# Allegro board BP1_03v2.brd
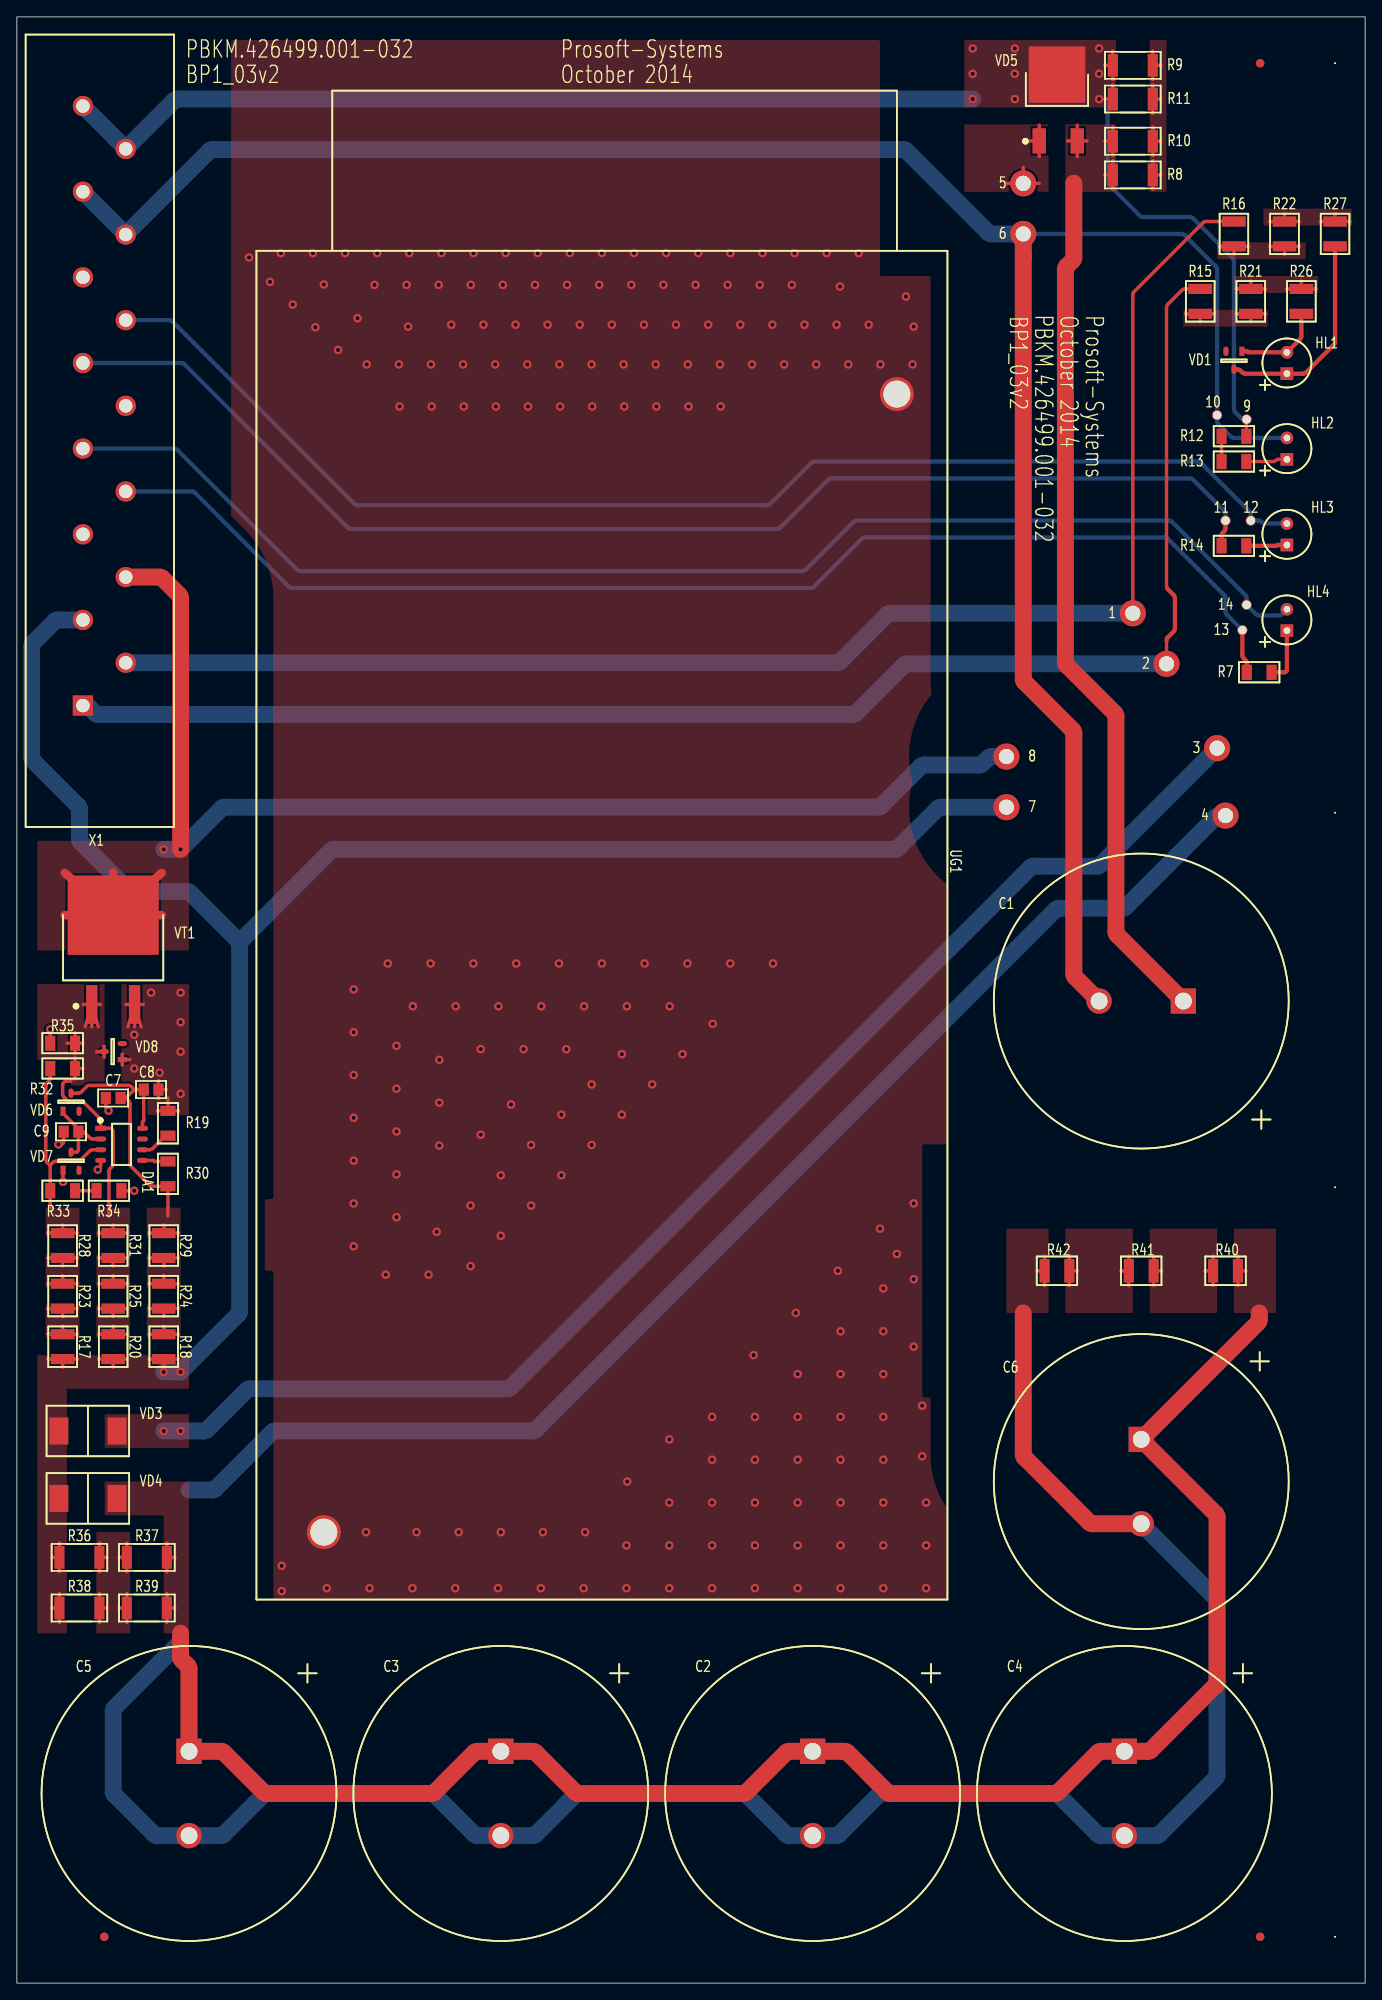
[diagram p0: board, top side]
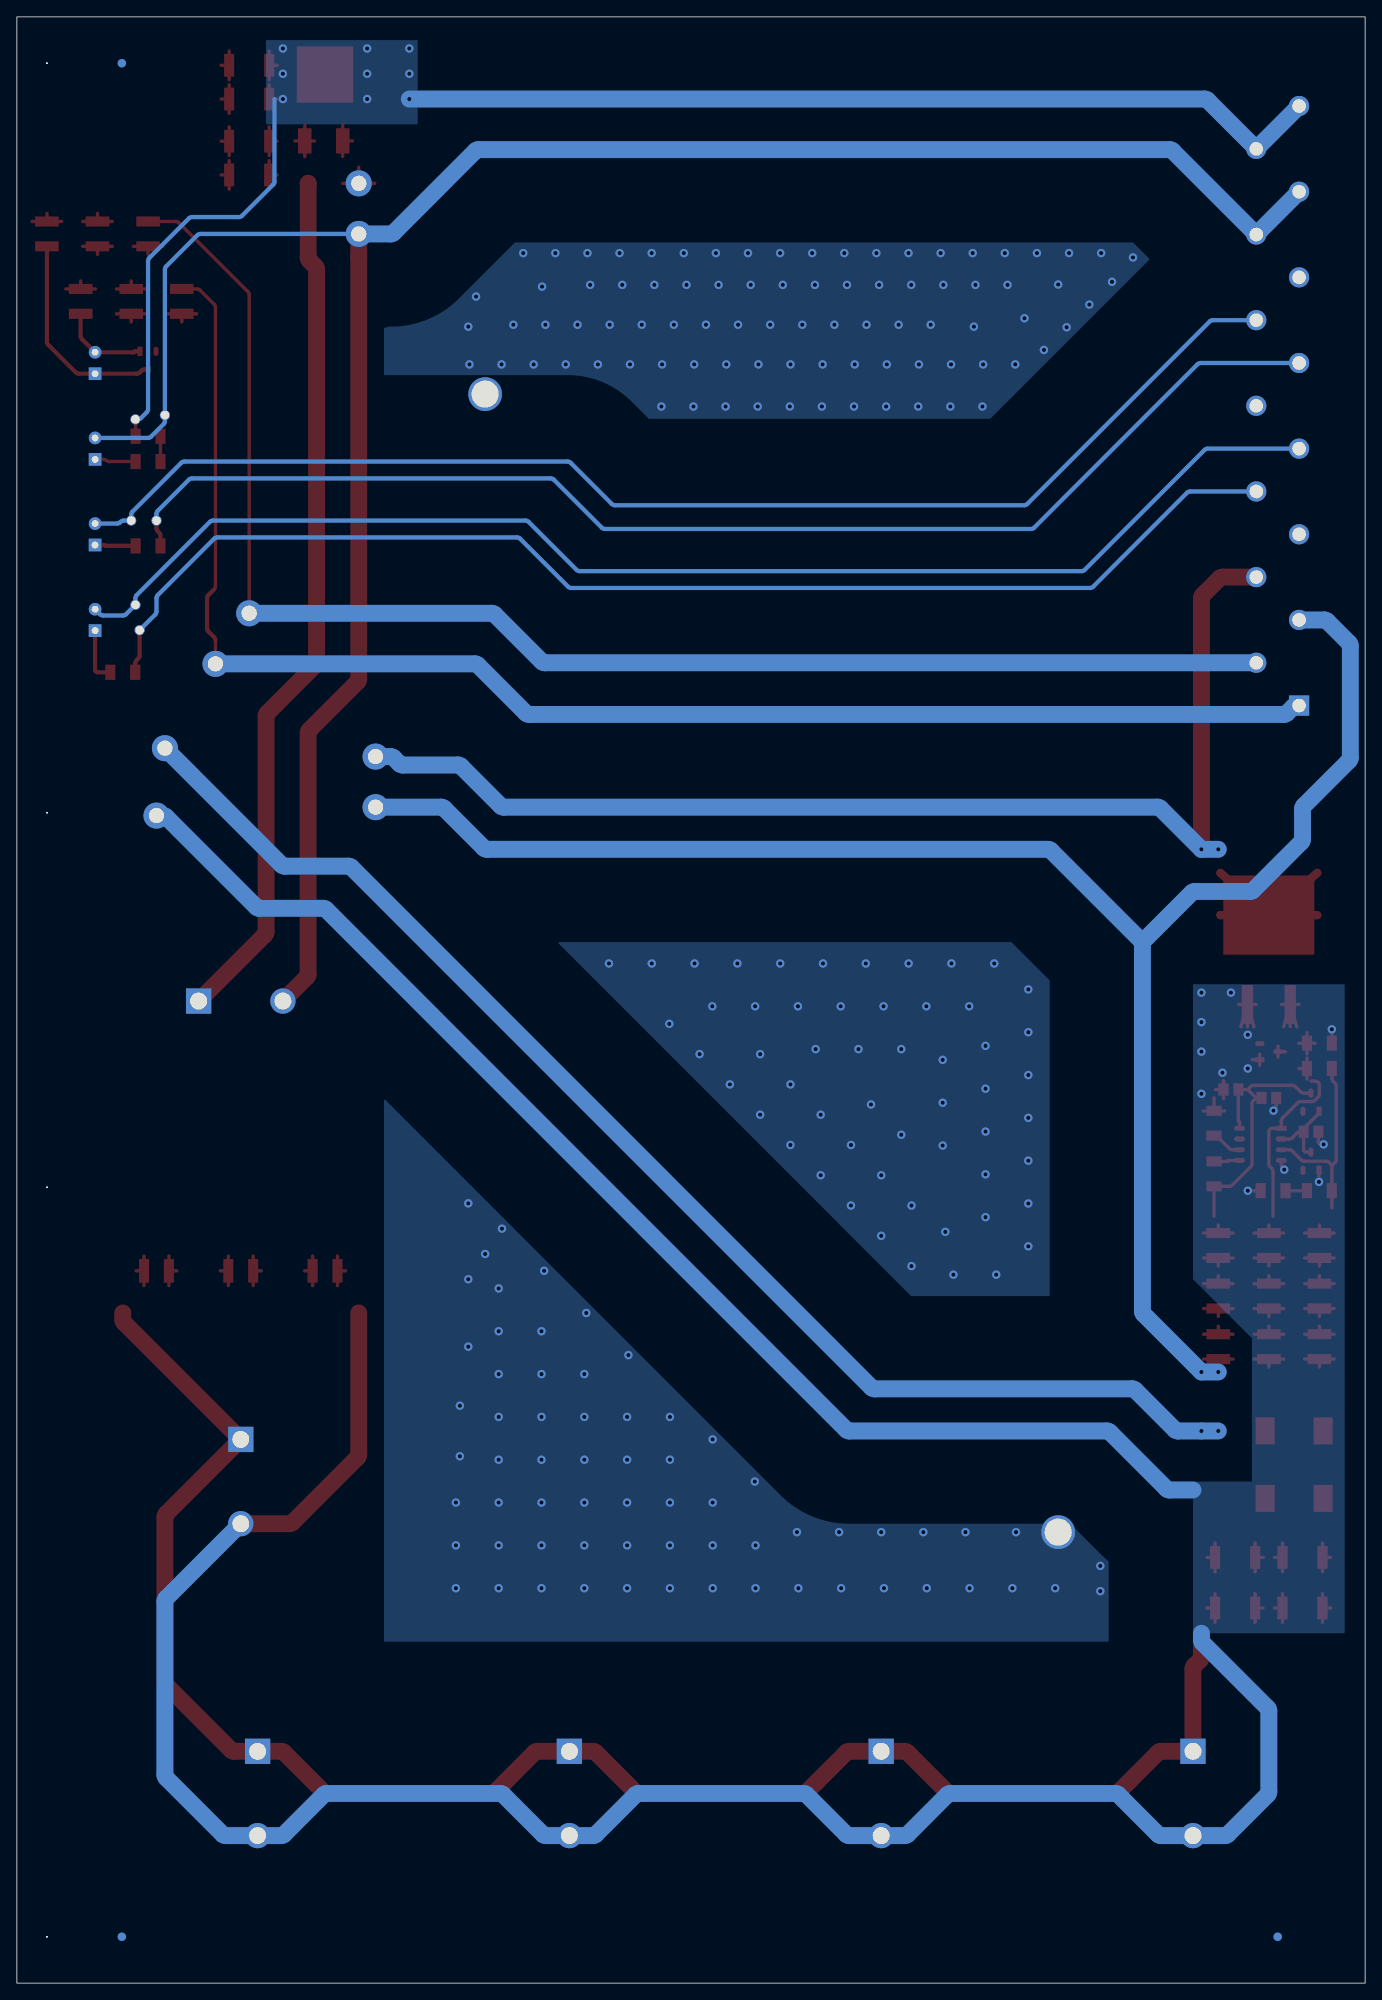
[diagram p1: board, bottom side, seen from below]

Outline 160 x 233.25 mm; copper layers: TOP, BOTTOM. Coordinates in mm from the lower left corner of the outline.
Outline path: rectangle 0,0 160,233.25

## Placement (name value [footprint] x y rotation side)
C1  15000uF  [CAPPRR1000W55L3500T3500H5000N]  133.43 116.5 180 top
C2  470uF  [CAPPRR1000W55L3500T3500H5000N]  94.43 22.5 270 top
C3  470uF  [CAPPRR1000W55L3500T3500H5000N]  57.43 22.5 270 top
C4  470uF  [CAPPRR1000W55L3500T3500H5000N]  131.43 22.5 270 top
C5  470uF  [CAPPRR1000W55L3500T3500H5000N]  20.43 22.5 270 top
C6  470uF  [CAPPRR1000W55L3500T3500H5000N]  133.43 59.5 270 top
C7  1uF  [CAPC2012X130N]  11.43 105 180 top
C8  0.1uF  [CAPC2012X130N]  15.93 106 0 top
C9  0.1uF  [CAPC2012X130N]  6.43 101 180 top
DA1  LM293D  [SOIC127P600X175-8N]  12.43 99.5 0 top
HL1  L-53SYT  [LEDRR254W47L590T590H500N]  150.72 192.19 90 top
HL2  L-53GD  [LEDRR254W47L590T590H500N]  150.72 182.03 90 top
HL3  L-53GD  [LEDRR254W47L590T590H500N]  150.72 171.87 90 top
HL4  L-53GD  [LEDRR254W47L590T590H500N]  150.72 161.71 90 top
NOREF  -  []  2.76 138.85 0 top
NOREF#2  -  []  156.43 138.85 90 top
NOREF#3  -  []  2.76 138.85 0 top
NOREF#4  -  []  150.72 161.71 90 top
NOREF#5  -  [unnamed#2]  10.38 5.5 0 top
NOREF#6  -  []  150.72 171.87 90 top
NOREF#7  -  []  2.76 227.79 0 top
NOREF#8  -  [unnamed#3]  156.43 227.75 0 top
NOREF#9  -  []  2.76 138.85 90 top
NOREF#10  -  [unnamed#2]  147.54 227.75 0 top
NOREF#11  -  []  160 0 90 top
NOREF#12  -  [unnamed#2]  147.54 5.5 0 top
NOREF#13  -  [unnamed#3]  156.43 5.5 0 top
NOREF#14  -  []  160 0 90 top
NOREF#15  -  []  156.43 5.5 90 top
NOREF#16  -  []  0 233.25 0 top
NOREF#17  -  []  0 233.25 0 top
NOREF#18  -  []  150.72 192.19 90 top
NOREF#19  -  [unnamed#3]  156.43 94.4 0 top
NOREF#20  -  []  2.76 227.75 90 top
NOREF#21  -  []  150.72 192.19 0 top
NOREF#22  -  [unnamed#3]  156.43 138.85 0 top
NOREF#23  -  []  156.43 5.5 90 top
NOREF#24  -  []  150.72 182.03 90 top
NOREF#25  -  [unnamed#2]  147.54 227.75 180 bottom
NOREF#26  -  [unnamed#2]  10.38 5.5 180 bottom
NOREF#27  -  [unnamed#2]  147.54 5.5 180 bottom
R7  1k  [RESC3216X50N]  147.43 155.5 0 top
R8  56  [RESC5025X55N]  132.43 214.5 0 top
R9  56  [RESC5025X55N]  132.43 227.5 180 top
R10  56  [RESC5025X55N]  132.43 218.5 0 top
R11  56  [RESC5025X55N]  132.43 223.5 180 top
R12  6.2k  [RESC3216X50N]  144.43 183.5 0 top
R13  6.2k  [RESC3216X50N]  144.43 180.5 180 top
R14  4.7k  [RESC3216X50N]  144.43 170.5 0 top
R15  10k  [RESC3226X55N]  140.43 199.5 90 top
R16  10k  [RESC3226X55N]  144.43 207.5 90 top
R17  33k  [RESC3226X55N]  5.43 75.5 270 top
R18  33k  [RESC3226X55N]  17.43 75.5 270 top
R19  10k  [RESC3216X50N]  17.93 102 90 top
R20  33k  [RESC3226X55N]  11.43 75.5 270 top
R21  10k  [RESC3226X55N]  146.43 199.5 270 top
R22  10k  [RESC3226X55N]  150.43 207.5 270 top
R23  33k  [RESC3226X55N]  5.43 81.5 270 top
R24  33k  [RESC3226X55N]  17.43 81.5 270 top
R25  33k  [RESC3226X55N]  11.43 81.5 270 top
R26  10k  [RESC3226X55N]  152.43 199.5 90 top
R27  10k  [RESC3226X55N]  156.43 207.5 90 top
R28  33k  [RESC3226X55N]  5.43 87.5 270 top
R29  33k  [RESC3226X55N]  17.43 87.5 270 top
R30  10k  [RESC3216X50N]  17.93 96 270 top
R31  33k  [RESC3226X55N]  11.43 87.5 270 top
R32  47k  [RESC3216X50N]  5.43 108.5 180 top
R33  10k  [RESC3216X50N]  5.43 94 180 top
R34  3.3k  [RESC3216X50N]  10.93 94 180 top
R35  10k  [RESC3216X50N]  5.43 111.5 0 top
R36  1k  [RESC5025X55N]  7.43 50.5 0 top
R37  1k  [RESC5025X55N]  15.43 50.5 0 top
R38  1k  [RESC5025X55N]  7.43 44.5 0 top
R39  1k  [RESC5025X55N]  15.43 44.5 0 top
R40  33k  [RESC3226X55N]  143.43 84.5 0 top
R41  33k  [RESC3226X55N]  133.43 84.5 0 top
R42  33k  [RESC3226X55N]  123.43 84.5 0 top
TP1  1  [KP_1_8]  132.43 162.5 0 top
TP2  2  [KP_1_8]  136.43 156.5 0 top
TP3  3  [KP_1_8]  142.43 146.5 0 top
TP4  4  [KP_1_8]  143.43 138.5 0 top
TP5  5  [KP_1_8]  119.43 213.5 0 top
TP6  6  [KP_1_8]  119.43 207.5 0 top
TP7  7  [KP_1_8]  117.43 139.5 0 top
TP8  8  [KP_1_8]  117.43 145.5 0 top
TP9  9  [KP_100X120]  145.93 185.5 0 top
TP10  10  [KP_100X120]  142.43 186 0 top
TP11  11  [KP_100X120]  143.43 173.5 0 top
TP12  12  [KP_100X120]  146.43 173.5 0 top
TP13  13  [KP_100X120]  145.43 160.5 0 top
TP14  14  [KP_100X120]  145.93 163.5 0 top
UG1  HWS150-48/A  [TDK_HWS150]  69.43 125.5 270 top
VD1  BZX84C3V3  [SOT95P230X110-3N]  144.43 192.5 270 top
VD3  S3M  [DIOM7959X265N]  8.43 65.5 0 top
VD4  S3M  [DIOM7959X265N]  8.43 57.5 0 top
VD5  STPS15L60CB  [TO450P972X240-3N]  123.43 225 90 top
VD6  15V  [SOT95P230X110-3N]  6.43 104.5 90 top
VD7  15V  [SOT95P230X110-3N]  6.43 97.5 90 top
VD8  BZX84C15  [SOT95P230X110-3N]  11.43 110.5 180 top
VT1  IRF840SPBF  [TO508P1524X490-3N]  11.43 122.5 90 top
X1  09061152911  [DIN41612-H15]  7.84 151.55 270 top

## Library data of the parts
C1-C6 = CAPACITOR_POL
C7-C9 = CAPACITOR
DA1 = LMC6762
HL1-HL4 = LED
R7 R12-R14 R19 R30 R32-R35 = R_0.25W
R8-R11 R36-R39 = R_1.75W
R15-R18 R20-R29 R31 R40-R42 = R_0.5W
TP1 = TP_2
TP2 = TP_3
TP3-TP8 = TP_1
TP9-TP14 = TP
UG1 = HWS150_3
VD1 VD6-VD8 = STAB_3
VD3 VD4 = DIODE
VD5 = Diod_Shottky_Dual_ComCath_0
VT1 = MOS_n_channel_induced_1
X1 = DIN41612-H15_3

## Footprints (pads in the part's own frame, mm; a bottom-side part is the same pattern mirrored in y, then rotated)
CAPC2012X130N
  rect 1.2x1.45 smd: 1(-0.875,0) 2(0.875,0)
CAPPRR1000W55L3500T3500H5000N
  rect 3x3 hole 2: 1(-5,0)
  round 3 hole 2: 2(5,0)
DIN41612-H15
  round 0 hole 2.8 unplated: (-76.2,-5.08) (12.7,-5.08)
  rect 2.4x2.4 hole 1.6: 4(0,0)
  round 2.4 hole 1.6: 6(-5.08,5.08) 8(-10.16,0) 10(-15.24,5.08) 12(-20.32,0) 14(-25.4,5.08) 16(-30.48,0) 18(-35.56,5.08) 20(-40.64,0) 22(-45.72,5.08) 24(-50.8,0) 26(-55.88,5.08) 28(-60.96,0) 30(-66.04,5.08) 32(-71.12,0)
DIOM7959X265N
  rect 2.26x3.2 smd: 1(-3.45,0) 2(3.45,0)
KP_1_8
  round 3.1 hole 1.8: 1(0,0)
KP_100X120
  round 1.2 hole 1: 1(0,0)
LEDRR254W47L590T590H500N
  rect 1.5x1.5 hole 0.8: 1(-1.27,0)
  round 1.5 hole 0.8: 2(1.27,0)
RESC3216X50N
  rect 1.2x1.8 smd: 1(-1.475,0) 2(1.475,0)
RESC3226X55N
  rect 1.2x2.8 smd: 1(-1.475,0) 2(1.475,0)
RESC5025X55N
  rect 1.2x2.7 smd: 1(-2.375,0) 2(2.375,0)
SOIC127P600X175-8N
  rect 1.3x0.6 smd: 1(-2.482,1.905)
  oval 1.3x0.6 smd: 2(-2.482,0.635) 3(-2.482,-0.635) 4(-2.482,-1.905) 5(2.482,-1.905) 6(2.482,-0.635) 7(2.482,0.635) 8(2.482,1.905)
SOT95P230X110-3N
  rect 1.1x0.6 smd: 1(-1.075,0.95)
  oval 1.1x0.6 smd: 2(-1.075,-0.95) 3(1.075,0)
TDK_HWS150
  round 4 hole 3.2: SHIELD1(-63,35) SHIELD2(72,-33)
TO450P972X240-3N
  rect 3x1.6 smd: 1(-6.465,2.1) 2(-6.465,-2.4)
  rect 6.7x6.7 smd: 3(1.405,0)
TO508P1524X490-3N
  rect 4.6x1.35 smd: 1(-6.4,2.54) 2(-6.4,-2.54)
  rect 9.4x10.8 smd: 3(4.192,0)
unnamed#2
  round 1 smd: (0,0)
unnamed#3
  round 0.2 hole 2.7 unplated: (0,0)

## Nets
+5V: R7.1 TP13.1 X1.14(+5V)
+24V: R14.1 TP11.1 X1.20(+24V)
+48V: R9.2 R11.2 R12.2 TP9.1 VD5.3(CATHODE) X1.30(+48V#30) X1.32(+48V#32)
-5V: HL4.2(CATHODE) TP14.1 X1.16(-5V)
-24V: HL3.2(CATHODE) TP12.1 X1.22(-24V)
-48V: C1.2 HL2.2(CATHODE) TP6.1 TP10.1 X1.26(-48V#26) X1.28(-48V#28)
+BAT: R16.2 TP1.1 X1.6(+BAT)
+KP: R17.2 R18.2 R20.2 R36.1 R38.1 TP7.1 VD3.1(CATHODE) VD4.1(CATHODE) X1.8(+KP)
-BAT: R15.2 TP2.1 X1.4(-BAT)
-KP: TP8.1 VT1.3(D) X1.10(-KP)
SH: UG1.SHIELD1(SH1) UG1.SHIELD2(SH2)
N111405: C1.1 R8.1 R10.1 VD5.2(ANODE2)
N111623: TP5.1 VD5.1(ANODE1)
N112623: HL4.1(ANODE) R7.2
N113355: TP3.1 VD3.2(ANODE)
N113537: C2.1 C3.1 C4.1 C5.1 C6.1 R37.2 R39.2 R40.2 VD4.2(ANODE)
N113585: C2.2 C3.2 C4.2 C5.2 C6.2 C7.2 C8.2 C9.2 DA1.4(V-) R19.2 R34.1 R35.1 R42.1 TP4.1 VD7.1(ANODE) VD8.1(ANODE) VT1.2(S)
N152333: R8.2 R9.1 R10.2 R11.1
N155037: HL1.2(CATHODE) R26.1 VD1.1(ANODE)
N155041: HL1.1(ANODE) R27.1 VD1.3(CATHODE)
N157650: R36.2 R37.1 R38.2 R39.1
N158657: R41.1 R42.2
N159027: R16.1 R22.2
N159031: R22.1 R27.2
N159195: R15.1 R21.2
N159199: R21.1 R26.2
N160165: R40.1 R41.2
N162837: DA1.1(OUT) R31.1 R32.1 R35.2 VD8.3(CATHODE) VT1.1(G)
N163573: C9.1 DA1.2(-IN) VD6.1(ANODE) VD7.3(CATHODE)
N163739: R33.1 R34.2
N163831: DA1.3(+IN) R28.1 R32.2 R33.2
N163835: R23.1 R28.2
N163839: R17.1 R23.2
N164728: R25.1 R31.2
N164732: R20.1 R25.2
N165077: C7.1 C8.1 DA1.8(V+) R29.1 R30.2 VD6.3(CATHODE)
N165300: R24.1 R29.2
N165320: R18.1 R24.2
N166953: HL3.1(ANODE) R14.2
N168363: R12.1 R13.2
N175808: DA1.5(+IN) R30.1
N179173: DA1.6(-IN) R19.1
N190299: HL2.1(ANODE) R13.1

Pads without a net: DA1 7; VD1 2; VD6 2; VD7 2; VD8 2; X1 12 18 24

## Via types
v1: diameter 1, hole 0.5, TOP to BOTTOM, 237 vias

## Routing (per net, layer and track width the routed paths; a pad name or vN(x,y) marks a point on that pad's centre or on a via; arc(x,y) is an arc through that point)
+5V: length 150.5
  TOP w0.5: TP13.1 145.43,157.51 arc(145.47,157.32) 145.58,157.16 145.81,156.92 arc(145.92,156.76) 145.96,156.57 R7.1
  BOTTOM w0.5: TP13.1 143.58,162.35 arc(143.47,162.52) 143.43,162.71 143.43,164.29 arc(143.39,164.48) 143.28,164.65 136.58,171.35 arc(136.41,171.46) 136.22,171.5 100.64,171.5 arc(100.45,171.46) 100.28,171.35 94.58,165.65 arc(94.41,165.54) 94.22,165.5 32.64,165.5 arc(32.45,165.54) 32.28,165.65 21.13,176.8 arc(20.96,176.91) 20.77,176.95 X1.14
+24V: length 151.9
  TOP w0.5: TP11.1 143.43,172.58 arc(143.39,172.39) 143.28,172.23 143.1,172.05 arc(142.99,171.88) 142.96,171.69 R14.1
  BOTTOM w0.5: X1.20 19.53,192.19 arc(19.72,192.15) 19.89,192.04 39.28,172.65 arc(39.45,172.54) 39.64,172.5 90.22,172.5 arc(90.41,172.54) 90.58,172.65 96.28,178.35 arc(96.45,178.46) 96.64,178.5 139.22,178.5 arc(139.41,178.46) 139.58,178.35 143.28,174.65 arc(143.39,174.48) 143.43,174.29 TP11.1
+48V: length 167.6
  TOP w0.4: TP9.1 145.91,184.99 arc(145.91,184.98) 145.91,184.96 R12.2 ; R9.2 130.06,229.2 ; R9.2 130.06,225.8 ; R9.2 129.1,227.5 ; 129.1,223.5 R11.2 130.06,225.2
  BOTTOM w0.5: 129.43,223.5 129.43,213.71 arc(129.47,213.52) 129.58,213.35 133.28,209.65 arc(133.45,209.54) 133.64,209.5 139.22,209.5 arc(139.41,209.46) 139.58,209.35 144.28,204.65 arc(144.39,204.48) 144.43,204.29 144.43,186.71 arc(144.47,186.52) 144.58,186.35 145.28,185.65 arc(145.45,185.54) 145.64,185.5 TP9.1
  BOTTOM w2: v1(113.43,223.5) 19.04,223.5 arc(18.85,223.46) 18.68,223.35 X1.30 X1.32
  vias: v1(113.43,229.5) v1(113.43,226.5) v1(118.43,229.5) v1(118.43,226.5) v1(118.43,223.5) v1(128.43,229.5) v1(128.43,226.5) v1(128.43,223.5)
-5V: length 156.8
  BOTTOM w0.5: X1.16 18.69,182.03 arc(18.88,181.99) 19.05,181.88 33.28,167.65 arc(33.45,167.54) 33.64,167.5 93.22,167.5 arc(93.41,167.54) 93.58,167.65 99.28,173.35 arc(99.45,173.46) 99.64,173.5 136.72,173.5 arc(136.91,173.46) 137.08,173.35 145.78,164.65 arc(145.89,164.48) 145.93,164.29 TP14.1 147.05,162.38 arc(147.21,162.27) 147.4,162.23 149.76,162.23 arc(149.95,162.27) 150.12,162.38 HL4.2
-24V: length 152.4
  BOTTOM w0.5: X1.22 18.08,197.27 arc(18.27,197.23) 18.44,197.12 40.1,175.46 arc(40.26,175.35) 40.45,175.31 89.04,175.31 arc(89.23,175.35) 89.39,175.46 94.28,180.35 arc(94.45,180.46) 94.64,180.5 140.13,180.5 arc(140.32,180.46) 140.48,180.35 146.28,174.55 arc(146.39,174.39) 146.43,174.2 TP12.1 147.32,173.5 arc(147.51,173.46) 147.68,173.35 147.74,173.29 arc(147.91,173.18) 148.1,173.14 HL3.2
-48V: length 268.6
  TOP w2: C1.2 125.58,119.35 arc(125.47,119.52) 125.43,119.71 125.43,148.29 arc(125.39,148.48) 125.28,148.65 119.58,154.35 arc(119.47,154.52) 119.43,154.71 119.43,204.82 119.43,204.82 TP6.1
  BOTTOM w0.5: TP6.1 138.22,207.5 arc(138.41,207.46) 138.58,207.35 142.28,203.65 arc(142.39,203.48) 142.43,203.29 TP10.1 142.43,185.3 arc(142.47,185.11) 142.58,184.95 144.08,183.45 arc(144.24,183.34) 144.43,183.3 HL2.2
  BOTTOM w2: TP6.1 115.64,207.5 arc(115.45,207.54) 115.28,207.65 105.58,217.35 arc(105.41,217.46) 105.22,217.5 23.2,217.5 arc(23.01,217.46) 22.84,217.35 X1.26 X1.28
+BAT: length 175.4
  TOP w0.4: R16.2 141.11,208.97 arc(140.92,208.94) 140.76,208.83 132.58,200.65 arc(132.47,200.48) 132.43,200.29 TP1.1
  BOTTOM w2: TP1.1 103.64,162.5 arc(103.45,162.46) 103.28,162.35 97.71,156.78 arc(97.54,156.67) 97.35,156.63 X1.6
+KP: length 232.3
  TOP w0.4: 3.68,74.03 R17.2 ; R17.2 5.43,73.07 ; R17.2 7.18,74.03 ; R20.2 13.18,74.03 ; R20.2 11.43,73.07 ; R20.2 9.68,74.03 ; R38.1 5.06,46.2 ; R38.1 4.1,44.5 ; R38.1 5.06,42.8 ; R18.2 19.18,74.03 ; R18.2 17.43,73.07 ; R18.2 15.68,74.03 ; R36.1 5.06,52.2 ; R36.1 5.06,48.8 ; R36.1 4.1,50.5
  BOTTOM w2: 26.43,123.5 20.58,129.35 arc(20.41,129.46) 20.22,129.5 13.64,129.5 arc(13.45,129.54) 13.28,129.65 7.58,135.35 arc(7.47,135.52) 7.43,135.71 7.43,139.29 arc(7.39,139.48) 7.28,139.65 1.91,145.02 arc(1.8,145.19) 1.76,145.38 1.76,158.62 arc(1.8,158.81) 1.91,158.98 4.49,161.56 arc(4.66,161.67) 4.85,161.71 X1.8 ; 26.43,123.5 37.28,134.35 arc(37.45,134.46) 37.64,134.5 104.22,134.5 arc(104.41,134.54) 104.58,134.65 109.28,139.35 arc(109.45,139.46) 109.64,139.5 TP7.1 ; 26.43,123.5 26.43,79.71 arc(26.39,79.52) 26.28,79.35 v1(19.43,72.5) v1(17.43,72.5)
-BAT: length 179.4
  TOP w0.4: R15.2 138.61,200.97 arc(138.42,200.94) 138.26,200.83 136.58,199.15 arc(136.47,198.98) 136.43,198.79 136.43,165.71 arc(136.47,165.52) 136.58,165.35 ; 136.43,159.29 TP2.1
  TOP w0.5: 136.58,165.35 137.28,164.65 arc(137.39,164.48) 137.43,164.29 137.43,160.71 arc(137.39,160.52) 137.28,160.35 136.58,159.65 arc(136.47,159.48) 136.43,159.29
  BOTTOM w2: X1.4 8.17,151.55 arc(8.36,151.51) 8.53,151.4 9.28,150.65 arc(9.45,150.54) 9.64,150.5 99.22,150.5 arc(99.41,150.54) 99.58,150.65 105.28,156.35 arc(105.45,156.46) 105.64,156.5 TP2.1
-KP: length 173.7
  TOP w1: 5.68,131.7 VT1.3 ; VT1.3 17.18,131.7 ; VT1.3 11.43,131.74 ; VT1.3 5.68,126.69 ; VT1.3 17.18,126.69
  TOP w2: X1.10 16.93,166.79 arc(17.12,166.75) 17.29,166.64 19.28,164.65 arc(19.39,164.48) 19.43,164.29 v1(19.43,134.5)
  BOTTOM w2: v1(17.43,134.5) v1(19.43,134.5) 24.28,139.35 arc(24.45,139.46) 24.64,139.5 102.22,139.5 arc(102.41,139.54) 102.58,139.65 107.28,144.35 arc(107.45,144.46) 107.64,144.5 114.22,144.5 arc(114.41,144.54) 114.58,144.65 115.28,145.35 arc(115.45,145.46) 115.64,145.5 TP8.1
SH:
  vias: v1(27.56,204.71) v1(30.04,201.82) v1(31.33,205.23) v1(31.43,49.5) v1(31.43,46.5) v1(32.73,199.12) v1(35.14,205.23) v1(35.43,196.43) v1(36.43,201.5) v1(36.78,46.85) v1(38.12,193.74) v1(38.95,205.23) v1(39.97,117.88) v1(39.97,112.8) v1(39.97,107.72) v1(39.97,102.64) v1(39.97,97.56) v1(39.97,92.48) v1(39.97,87.4) v1(40.43,197.5) v1(41.43,53.5) v1(41.52,192.02) v1(41.86,46.85) v1(42.44,201.46) v1(42.76,205.23) v1(43.78,84.04) v1(44.02,120.96) v1(45.05,111.18) v1(45.05,106.1) v1(45.05,101.02) v1(45.05,95.94) v1(45.05,90.86) v1(45.33,192.02) v1(45.42,187.03) v1(46.25,201.46) v1(46.43,196.5) v1(46.57,205.23) v1(46.94,46.85) v1(46.99,115.88) v1(47.43,53.5) v1(48.86,84.04) v1(49.14,192.02) v1(49.1,120.96) v1(49.23,187.03) v1(49.82,89.12) v1(50.06,201.46) v1(50.13,109.52) v1(50.13,104.44) v1(50.13,99.36) v1(50.38,205.23) v1(51.56,196.73) v1(52.07,115.88) v1(52.02,46.85) v1(52.43,53.5) v1(52.95,192.02) v1(53.04,187.03) v1(53.87,201.46) v1(53.84,92.24) v1(53.84,85.06) v1(54.18,120.96) v1(54.19,205.23) v1(55.05,110.8) v1(55.05,100.64) v1(55.37,196.73) v1(56.76,192.02) v1(56.85,187.03) v1(57.15,115.88) v1(57.1,46.85) v1(57.43,95.83) v1(57.43,88.65) v1(57.43,53.5) v1(57.68,201.46) v1(58,205.23) v1(58.64,104.23) v1(59.18,196.73) v1(59.26,120.96) v1(60.13,110.8) v1(60.57,192.02) v1(60.66,187.03) v1(61.02,99.42) v1(61.02,92.24) v1(61.49,201.46) v1(61.81,205.23) v1(62.23,115.88) v1(62.18,46.85) v1(62.43,53.5) v1(62.99,196.73) v1(64.34,120.96) v1(64.38,192.02) v1(64.47,187.03) v1(64.61,103.02) v1(64.61,95.83) v1(65.21,110.8) v1(65.3,201.46) v1(65.62,205.23) v1(66.8,196.73) v1(67.26,46.85) v1(67.31,115.88) v1(67.43,53.5) v1(68.19,192.02) v1(68.28,187.03) v1(68.2,106.61) v1(68.21,99.43) v1(69.11,201.46) v1(69.43,205.23) v1(69.42,120.96) v1(70.61,196.73) v1(71.8,110.2) v1(71.8,103.02) v1(72,192.02) v1(72.09,187.03) v1(72.34,51.93) v1(72.34,46.85) v1(72.39,115.88) v1(72.43,59.5) v1(72.92,201.46) v1(73.24,205.23) v1(74.42,196.73) v1(74.5,120.96) v1(75.39,106.61) v1(75.81,192.02) v1(75.9,187.03) v1(76.73,201.46) v1(77.05,205.23) v1(77.47,115.88) v1(77.43,64.5) v1(77.42,57.01) v1(77.42,51.93) v1(77.42,46.85) v1(78.23,196.73) v1(78.98,110.2) v1(79.58,120.96) v1(79.62,192.02) v1(79.71,187.03) v1(80.54,201.46) v1(80.86,205.23) v1(82.04,196.73) v1(82.57,113.8) v1(82.5,67.17) v1(82.5,62.09) v1(82.5,57.01) v1(82.5,51.93) v1(82.5,46.85) v1(83.43,192.02) v1(83.52,187.03) v1(84.35,201.46) v1(84.67,205.23) v1(84.66,120.96) v1(85.85,196.73) v1(87.24,192.02) v1(87.43,74.5) v1(87.58,67.17) v1(87.58,62.09) v1(87.58,57.01) v1(87.58,51.93) v1(87.58,46.85) v1(88.16,201.46) v1(88.48,205.23) v1(89.66,196.73) v1(89.74,120.96) v1(91.05,192.02) v1(91.97,201.46) v1(92.29,205.23) v1(92.43,79.5) v1(92.66,72.25) v1(92.66,67.17) v1(92.66,62.09) v1(92.66,57.01) v1(92.66,51.93) v1(92.66,46.85) v1(93.47,196.73) v1(94.86,192.02) v1(96.1,205.23) v1(97.28,196.73) v1(97.43,84.5) v1(97.68,201.25) v1(97.74,77.33) v1(97.74,72.25) v1(97.74,67.17) v1(97.74,62.09) v1(97.74,57.01) v1(97.74,51.93) v1(97.74,46.85) v1(98.67,192.02) v1(99.91,205.23) v1(101.09,196.73) v1(102.43,89.5) v1(102.48,192.02) v1(102.82,82.41) v1(102.82,77.33) v1(102.82,72.25) v1(102.82,67.17) v1(102.82,62.09) v1(102.82,57.01) v1(102.82,51.93) v1(102.82,46.85) v1(104.43,86.5) v1(105.51,200.07) v1(106.29,192.02) v1(106.43,196.5) v1(106.43,92.5) v1(106.43,83.5) v1(106.43,75.5) v1(107.43,68.5) v1(107.43,62.5) v1(107.9,57.01) v1(107.9,51.93) v1(107.9,46.85)
N111405: length 117.8
  TOP w0.4: R8.1 130.06,216.2 ; R8.1 130.06,212.8 ; R8.1 129.1,214.5 ; R10.1 130.06,220.2 ; R10.1 129.1,218.5 ; R10.1 130.06,216.8 ; 125.83,216.68 VD5.2 ; VD5.2 126.98,218.53 ; VD5.2 125.83,220.39 ; VD5.2 124.68,218.53
  TOP w2: C1.1 130.58,124.36 arc(130.47,124.52) 130.43,124.71 130.43,150.29 arc(130.39,150.48) 130.28,150.65 124.58,156.35 arc(124.47,156.52) 124.43,156.71 124.43,203.29 arc(124.47,203.48) 124.58,203.65 125.28,204.35 arc(125.39,204.52) 125.43,204.71 125.43,213.5
N111623: length 10.6
  TOP w0.4: 121.33,216.68 VD5.1 ; VD5.1 120.18,218.53 ; VD5.1 121.33,220.39 ; TP5.1 121.33,213.5 ; TP5.1 117.53,213.5 ; TP5.1 119.43,215.4
N112623: length 6.6
  TOP w0.5: R7.2 150.43,155.5 arc(150.63,155.58) 150.72,155.78 HL4.1
N113355: length 158.4
  BOTTOM w2: TP3.1 128.58,132.65 arc(128.41,132.54) 128.22,132.5 120.64,132.5 arc(120.45,132.46) 120.28,132.35 58.58,70.65 arc(58.41,70.54) 58.22,70.5 27.64,70.5 arc(27.45,70.46) 27.28,70.35 22.58,65.65 arc(22.41,65.54) 22.22,65.5 v1(19.43,65.5) v1(17.43,65.5)
N113537: length 218.5
  TOP w0.4: R39.2 17.81,46.2 ; R39.2 17.81,42.8 ; R39.2 18.76,44.5 ; R37.2 18.76,50.5 ; R37.2 17.81,52.2 ; R37.2 17.81,48.8 ; R40.2 144.91,86.25 ; R40.2 145.86,84.5 ; R40.2 144.91,82.75
  TOP w2: 19.43,41.5 19.43,38.71 arc(19.47,38.52) 19.58,38.35 20.28,37.65 arc(20.39,37.48) 20.43,37.29 C5.1 24.22,27.5 arc(24.41,27.46) 24.58,27.35 29.28,22.65 arc(29.45,22.54) 29.64,22.5 49.22,22.5 arc(49.41,22.54) 49.58,22.65 54.28,27.35 arc(54.45,27.46) 54.64,27.5 C3.1 61.22,27.5 arc(61.41,27.46) 61.58,27.35 66.28,22.65 arc(66.45,22.54) 66.64,22.5 86.22,22.5 arc(86.41,22.54) 86.58,22.65 91.28,27.35 arc(91.45,27.46) 91.64,27.5 C2.1 98.22,27.5 arc(98.41,27.46) 98.58,27.35 103.28,22.65 arc(103.45,22.54) 103.64,22.5 123.22,22.5 arc(123.41,22.54) 123.58,22.65 128.28,27.35 arc(128.45,27.46) 128.64,27.5 C4.1 134.22,27.5 arc(134.41,27.54) 134.58,27.65 142.28,35.35 arc(142.39,35.52) 142.43,35.71 142.43,55.29 arc(142.39,55.48) 142.28,55.65 C6.1 147.28,78.35 arc(147.39,78.52) 147.43,78.71 147.43,79.5
N113585: length 427.7
  TOP w0.4: C8.2 16.81,107.08 ; C8.2 17.76,106 ; C8.2 16.81,104.92 ; v1(4.93,99.5) 5.23,99.5 arc(5.46,99.6) 5.56,99.83 C9.2 ; DA1.4 9.95,97.05 arc(9.91,96.86) 9.8,96.7 v1(9.6,96.5) ; VD8.1 13.41,109.55 ; VD8.1 12.5,108.9 ; VD8.1 12.5,110.2 ; 121.96,82.75 R42.1 ; R42.1 121.96,86.25 ; R42.1 121,84.5 ; VD7.1 v1(5.48,95.05) ; 13.19,113.45 VT1.2 ; VT1.2 12.94,116.1 ; VT1.2 14.75,113.45 ; VT1.2 13.97,113.45 ; VT1.2 15,116.1 ; R35.1 v1(3.96,113.15) ; R34.1 v1(13.93,94) ; C7.2 10.56,104.03 arc(10.59,103.84) 10.7,103.68 v1(10.88,103.5) ; R19.2 17.93,105 ; R19.2 16.68,103.47 ; R19.2 19.18,103.47
  TOP w2: C6.2 127.64,54.5 arc(127.45,54.54) 127.28,54.65 119.58,62.35 arc(119.47,62.52) 119.43,62.71 119.43,79.5
  BOTTOM w2: 19.43,41.5 19.43,40.71 arc(19.39,40.52) 19.28,40.35 11.58,32.65 arc(11.47,32.48) 11.43,32.29 11.43,22.71 arc(11.47,22.52) 11.58,22.35 16.28,17.65 arc(16.45,17.54) 16.64,17.5 C5.2 24.22,17.5 arc(24.41,17.54) 24.58,17.65 29.28,22.35 arc(29.45,22.46) 29.64,22.5 49.22,22.5 arc(49.41,22.46) 49.58,22.35 54.28,17.65 arc(54.45,17.54) 54.64,17.5 C3.2 61.22,17.5 arc(61.41,17.54) 61.58,17.65 66.28,22.35 arc(66.45,22.46) 66.64,22.5 86.22,22.5 arc(86.41,22.46) 86.58,22.35 91.28,17.65 arc(91.45,17.54) 91.64,17.5 C2.2 97.22,17.5 arc(97.41,17.54) 97.58,17.65 102.28,22.35 arc(102.45,22.46) 102.64,22.5 123.22,22.5 arc(123.41,22.46) 123.58,22.35 128.28,17.65 arc(128.45,17.54) 128.64,17.5 C4.2 135.22,17.5 arc(135.41,17.54) 135.58,17.65 142.28,24.35 arc(142.39,24.52) 142.43,24.71 142.43,45.29 arc(142.39,45.48) 142.28,45.65 C6.2 ; TP4.1 142.64,138.5 arc(142.45,138.46) 142.28,138.35 131.58,127.65 arc(131.41,127.54) 131.22,127.5 123.64,127.5 arc(123.45,127.46) 123.28,127.35 61.58,65.65 arc(61.41,65.54) 61.22,65.5 30.64,65.5 arc(30.45,65.46) 30.28,65.35 23.58,58.65 arc(23.41,58.54) 23.22,58.5 20.43,58.5
  vias: v1(13.93,112.5) v1(13.93,108.5) v1(15.93,117.5) v1(16.93,108) v1(19.43,117.5) v1(19.43,114) v1(19.43,110.5) v1(19.43,105.5)
N152333: length 17.4
  TOP w0.4: 134.81,216.8 R10.2 ; R10.2 134.81,220.2 ; R10.2 135.76,218.5 ; 134.81,221.8 R11.1 ; R11.1 135.76,223.5 ; R11.1 134.81,225.2 ; 134.81,225.8 R9.1 ; R9.1 134.81,229.2 ; R9.1 135.76,227.5 ; R8.2 135.76,214.5 ; R8.2 134.81,216.2 ; R8.2 134.81,212.8
N155037: length 10.6
  TOP w0.5: VD1.1 146.01,193.57 146.12,193.46 HL1.2 152.28,195.03 arc(152.39,195.19) 152.43,195.38 R26.1
N155041: length 25.1
  TOP w0.5: VD1.3 144.85,191.43 arc(145.04,191.39) 145.2,191.28 145.42,191.07 arc(145.58,190.96) 145.77,190.92 HL1.1 152.64,190.92 arc(152.83,190.96) 153,191.07 156.28,194.35 arc(156.39,194.52) 156.43,194.71 R27.1
N157650: length 17.4
  TOP w0.4: R36.2 10.76,50.5 ; R36.2 9.81,52.2 ; R36.2 9.81,48.8 ; R39.1 13.06,46.2 ; R39.1 13.06,42.8 ; R39.1 12.1,44.5 ; R38.2 9.81,46.2 ; R38.2 10.76,44.5 ; R38.2 9.81,42.8 ; 13.06,48.8 R37.1 ; R37.1 13.06,52.2 ; R37.1 12.1,50.5
N158657: length 8.9
  TOP w0.4: R42.2 124.91,86.25 ; R42.2 125.86,84.5 ; R42.2 124.91,82.75 ; 131.96,82.75 R41.1 ; R41.1 131,84.5 ; R41.1 131.96,86.25
N159027: length 8.9
  TOP w0.4: 144.43,205.07 R16.1 ; R16.1 142.68,206.03 ; R16.1 146.18,206.03 ; 150.43,205.07 R22.2 ; R22.2 152.18,206.03 ; R22.2 148.68,206.03
N159031: length 8.9
  TOP w0.4: R27.2 158.18,208.97 ; R27.2 156.43,209.93 ; R27.2 154.68,208.97 ; R22.1 150.43,209.93 ; R22.1 152.18,208.97 ; R22.1 148.68,208.97
N159195: length 8.9
  TOP w0.4: 146.43,197.07 R21.2 ; R21.2 144.68,198.03 ; R21.2 148.18,198.03 ; 140.43,197.07 R15.1 ; R15.1 138.68,198.03 ; R15.1 142.18,198.03
N159199: length 8.9
  TOP w0.4: R26.2 154.18,200.97 ; R26.2 152.43,201.93 ; R26.2 150.68,200.97 ; 144.68,200.97 R21.1 ; R21.1 148.18,200.97 ; R21.1 146.43,201.93
N160165: length 8.9
  TOP w0.4: R41.2 134.91,86.25 ; R41.2 135.86,84.5 ; R41.2 134.91,82.75 ; 141,84.5 R40.1 ; R40.1 141.96,86.25 ; R40.1 141.96,82.75
N162837: length 45.8
  TOP w0.4: 9.68,88.97 R31.1 ; R31.1 13.18,88.97 ; R31.1 11.43,89.93 ; 5.95,111.5 R35.2 ; R35.2 7.86,111.5 ; R35.2 6.91,112.75 ; R35.2 6.91,110.25 ; 10.36,109.85 VD8.3 ; VD8.3 9.45,110.5 ; VD8.3 10.36,111.15 ; 8.89,113.45 VT1.1 ; VT1.1 8.11,113.45 ; VT1.1 9.92,116.1 ; VT1.1 7.86,116.1 ; VT1.1 9.67,113.45 ; 6.43,107 5.93,107 arc(5.58,106.85) 5.43,106.5 5.43,105.47 arc(5.47,105.28) 5.58,105.12 5.97,104.72 arc(6.14,104.61) 6.33,104.58 7.65,104.58 arc(7.84,104.54) 8,104.43 9.8,102.63 arc(9.91,102.47) 9.95,102.28 DA1.1 11.03,101.41 arc(11.31,101.29) 11.43,101 11.43,97.21 arc(11.39,97.02) 11.28,96.85 11.08,96.65 arc(10.97,96.48) 10.93,96.29 10.93,91 ; R32.1 6.91,109.75 ; R32.1 6.91,107.25 ; R32.1 7.86,108.5
N163573: length 9.3
  TOP w0.4: DA1.2 9,100.14 arc(8.81,100.17) 8.65,100.28 8.08,100.85 arc(7.91,100.96) 7.72,101 C9.1 ; C9.1 7.31,101.14 arc(7.27,101.33) 7.16,101.5 5.63,103.03 arc(5.52,103.19) 5.48,103.38 VD6.1 ; C9.1 7.31,98.84 arc(7.23,98.65) 7.03,98.58 VD7.3
N163739: length 2.6
  TOP w0.4: R33.1 R34.2
N163831: length 28.1
  TOP w0.4: 3.93,97 3.96,96.97 R33.2 3.96,91.97 ; 3.93,97 4.28,97.35 arc(4.45,97.46) 4.64,97.5 7.22,97.5 arc(7.41,97.54) 7.58,97.65 8.65,98.72 arc(8.81,98.83) 9,98.86 DA1.3 ; 3.93,97 3.58,97.35 arc(3.47,97.52) 3.43,97.71 3.43,106.42 arc(3.47,106.61) 3.58,106.77 3.81,107 arc(3.92,107.17) 3.96,107.36 R32.2 ; R28.1 5.43,89.93 ; R28.1 7.18,88.97 ; R28.1 3.68,88.97
N163835: length 8.9
  TOP w0.4: 3.68,86.03 R28.2 ; R28.2 5.43,85.07 ; R28.2 7.18,86.03 ; R23.1 5.43,83.93 ; R23.1 7.18,82.97 ; R23.1 3.68,82.97
N163839: length 8.9
  TOP w0.4: 3.68,80.03 R23.2 ; R23.2 5.43,79.07 ; R23.2 7.18,80.03 ; R17.1 7.18,76.97 ; R17.1 3.68,76.97 ; R17.1 5.43,77.93
N164728: length 8.9
  TOP w0.4: R31.2 13.18,86.03 ; R31.2 9.68,86.03 ; R31.2 11.43,85.07 ; R25.1 13.18,82.97 ; R25.1 9.68,82.97 ; R25.1 11.43,83.93
N164732: length 8.9
  TOP w0.4: 11.43,79.07 R25.2 ; R25.2 9.68,80.03 ; R25.2 13.18,80.03 ; 9.68,76.97 R20.1 ; R20.1 11.43,77.93 ; R20.1 13.18,76.97
N165077: length 37.5
  TOP w0.4: 13.93,106 13.58,106.35 arc(13.41,106.46) 13.22,106.5 8.64,106.5 arc(8.45,106.46) 8.28,106.35 7.65,105.72 arc(7.49,105.61) 7.3,105.58 VD6.3 ; 13.93,106 12.93,105 ; 13.93,106 C8.1 15.06,102.3 14.91,102.16 DA1.8 ; 17.93,91 R30.2 16.11,94.53 arc(15.92,94.56) 15.76,94.67 13.58,96.85 arc(13.47,97.02) 13.43,97.21 13.43,104.29 arc(13.39,104.48) 13.28,104.65 12.93,105 ; R29.1 17.43,89.93 ; R29.1 19.18,88.97 ; R29.1 15.68,88.97 ; C7.1 12.93,105
N165300: length 8.9
  TOP w0.4: 15.68,86.03 R29.2 ; R29.2 17.43,85.07 ; R29.2 19.18,86.03 ; R24.1 17.43,83.93 ; R24.1 19.18,82.97 ; R24.1 15.68,82.97
N165320: length 8.9
  TOP w0.4: R24.2 19.18,80.03 ; R24.2 17.43,79.07 ; R24.2 15.68,80.03 ; R18.1 19.18,76.97 ; R18.1 15.68,76.97 ; R18.1 17.43,77.93
N166953: length 4.9
  TOP w0.5: HL3.1 149.59,170.6 149.49,170.5 R14.2
N168363: length 3
  TOP w0.4: R12.1 R13.2
N175808: length 3.1
  TOP w0.4: R30.1 16.33,97.47 16.21,97.59 DA1.5
N179173: length 3.7
  TOP w0.4: DA1.6 15.76,98.86 arc(15.95,98.9) 16.12,99.01 17.48,100.38 arc(17.65,100.49) 17.84,100.53 R19.1
N190299: length 4.9
  TOP w0.4: HL2.1 149.7,180.76 arc(149.53,180.73) 149.38,180.63 arc(149.24,180.53) 149.07,180.5 R13.1

## Copper pours and planes (outline as drawn; the poured copper is in the pictures)
+48V on TOP: 130.43,230.5 130.43,222.5 112.43,222.5 112.43,230.5
+48V on BOTTOM: 112.43,230.5 112.43,220.5 130.43,220.5 130.43,230.5
+KP on TOP: 5.93,70.5 5.93,41.5 2.43,41.5 2.43,74.5 20.43,74.5 20.43,70.5
-KP on TOP: 2.43,135.5 2.43,122.5 20.43,122.5 20.43,135.5
SH on TOP: 25.43,230.5 25.43,45.5 110.43,45.5 110.43,230.5
SH on BOTTOM: 25.43,230.5 25.43,40.5 116.43,40.5 116.43,230.5
N111405 on TOP: 124.43,220.5 124.43,212.5 130.43,212.5 130.43,220.5
N111623 on TOP: 122.43,220.5 122.43,212.5 112.43,212.5 112.43,220.5
N113355 on TOP: 10.43,67.5 10.43,63.5 20.43,63.5 20.43,67.5
N113537 on TOP: 144.43,89.5 144.43,79.5 149.43,79.5 149.43,89.5
N113537 on TOP: 17.43,41.5 20.43,41.5 20.43,59.5 10.43,59.5 10.43,55.5 17.43,55.5
N113585 on TOP: 122.43,89.5 122.43,79.5 117.43,79.5 117.43,89.5
N113585 on TOP: 20.43,103 20.43,118.5 12.43,118.5 12.43,103
N113585 on BOTTOM: 2.43,41.5 2.43,118.5 20.43,118.5 20.43,83.5 13.43,76.5 13.43,59.5 20.43,59.5 20.43,41.5
N152333 on TOP: 134.43,230.5 134.43,212.5 136.43,212.5 136.43,230.5
N157650 on TOP: 13.43,53.5 13.43,41.5 9.43,41.5 9.43,53.5
N158657 on TOP: 124.43,89.5 124.43,79.5 132.43,79.5 132.43,89.5
N159027 on TOP: 142.43,206.5 142.43,204.5 152.93,204.5 152.93,206.5
N159031 on TOP: 147.93,210.5 147.93,208.5 158.43,208.5 158.43,210.5
N159195 on TOP: 138.43,198.5 138.43,196.5 148.43,196.5 148.43,198.5
N159199 on TOP: 144.43,202.5 144.43,200.5 154.43,200.5 154.43,202.5
N160165 on TOP: 134.43,89.5 134.43,79.5 142.43,79.5 142.43,89.5
N162837 on TOP: 10.43,106.5 6.43,106.5 6.43,109.5 2.43,109.5 2.43,118.5 10.43,118.5
N162837 on TOP: 9.43,92 9.43,88.5 13.43,88.5 13.43,92
N163831 on TOP: 3.43,92 3.43,88.5 7.43,88.5 7.43,92
N163835 on TOP: 3.43,86.5 3.43,82.5 7.43,82.5 7.43,86.5
N163839 on TOP: 3.43,80.5 3.43,76.5 7.43,76.5 7.43,80.5
N164728 on TOP: 9.43,86.5 9.43,82.5 13.43,82.5 13.43,86.5
N164732 on TOP: 9.43,80.5 9.43,76.5 13.43,76.5 13.43,80.5
N165077 on TOP: 15.43,92 15.43,88.5 19.43,88.5 19.43,92
N165300 on TOP: 15.43,86.5 15.43,82.5 19.43,82.5 19.43,86.5
N165320 on TOP: 15.43,80.5 15.43,76.5 19.43,76.5 19.43,80.5

## Text on the board
Ref Des/Silkscreen Top: PBKM.426499.001-032 | BP1_03v2 | Prosoft-Systems | October 2014
DIMENSION: BP1_03v2 | PBKM.426499.001-032 | October 2014 | Prosoft-Systems
